# EAGLE board sch_smd_1206_component_only_component_all routed_draft_1 (EAGLE 8.4.1)
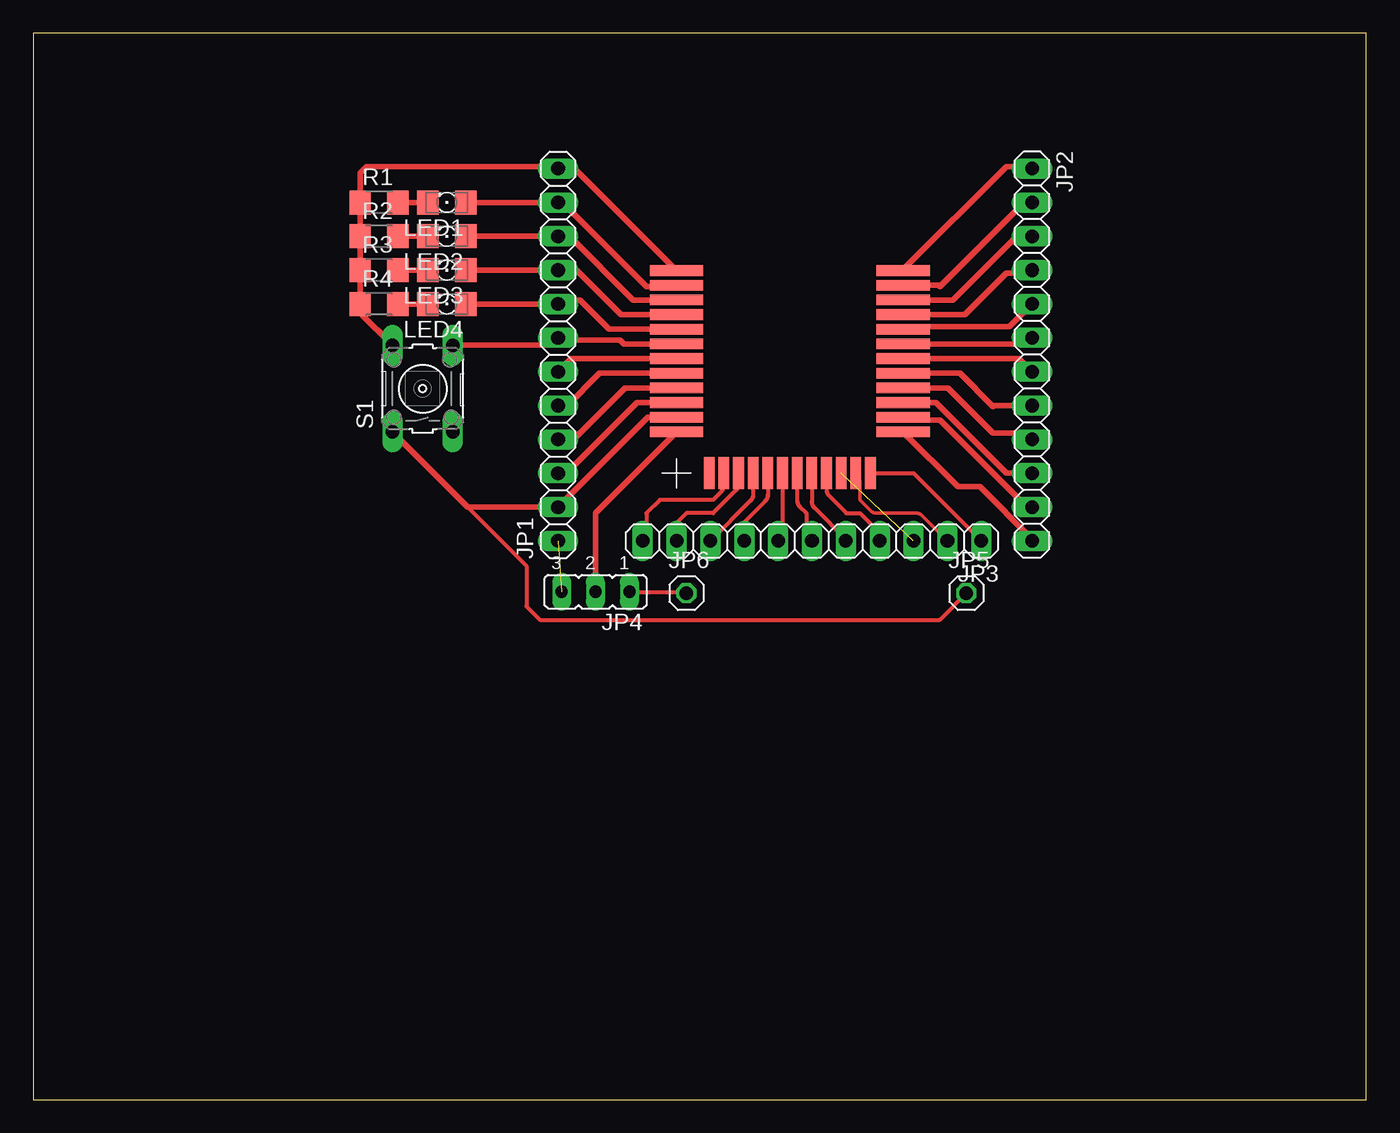
[diagram p0: board, top side]

Size 100 x 80 mm. Coordinates in mm from the lower left corner, seen from the top.
Outline: 0,0 100,0 100,80 0,80 0,0
Copper layers (1*16): Top 0.035mm / dielectric 1.5mm / Bottom 0.035mm
Design rules "default": minimum track width 6mil, minimum drill 0.35mm, track to track 6mil, track to pad 6mil, pad to pad 6mil, via to via 6mil, smd to smd 6mil, copper to edge 40mil, drill to drill 6mil, minimum pad ring 10mil, minimum via ring 8mil, stop-mask expansion 4mil, vias tented up to drill 0mil, thermal gap 10mil

## Footprints (pad centres in the part's own frame; a part is rotated, then mirrored left to right if it is on the bottom)
1X12 = drill 1.016 long: 1 -13.97,0; 2 -11.43,0; 3 -8.89,0; 4 -6.35,0; 5 -3.81,0; 6 -1.27,0; 7 1.27,0; 8 3.81,0; 9 6.35,0; 10 8.89,0; 11 11.43,0; 12 13.97,0
1X11 = drill 1.016 long: 1 -12.7,0; 2 -10.16,0; 3 -7.62,0; 4 -5.08,0; 5 -2.54,0; 6 0,0; 7 2.54,0; 8 5.08,0; 9 7.62,0; 10 10.16,0; 11 12.7,0
JP2 = drill 0.914 long: 1 -2.54,0; 2 0,0; 3 2.54,0
1X01 = drill 1.016 octagon: 1 0,0
LED_1206 = smd 1.6 x 1.803: A -1.422,0; C 1.422,0
R1206 = smd 1.6 x 1.803: 1 -1.422,0; 2 1.422,0
B3F-10XX = drill 1.016 long: 1 -3.251,2.261; 2 3.251,2.261; 3 -3.251,-2.261; 4 3.251,-2.261
SMD_PAD_VERSION = smd 4 x 0.8: P$01 0,15.2; P$02 0,14.1; P$03 0,13; P$04 0,11.9; P$05 0,10.8; P$06 0,9.7; P$07 0,8.6; P$08 0,7.5; P$09 0,6.4; P$10 0,5.3; P$11 0,4.2; P$12 0,3.1; P$25 17,3.1; P$26 17,4.2; P$27 17,5.3; P$28 17,6.4; P$29 17,7.5; P$30 17,8.6; P$31 17,9.7; P$32 17,10.8; P$33 17,11.9; P$34 17,13; P$35 17,14.1; P$36 17,15.2 | smd 0.8 x 2.4: P$13 2.45,0; P$14 3.55,0; P$15 4.65,0; P$16 5.75,0; P$17 6.85,0; P$18 7.95,0; P$19 9.05,0; P$20 10.15,0; P$21 11.25,0; P$22 12.35,0; P$23 13.45,0; P$24 14.55,0

## Placement (x,y rotation side)
JP1  [1X12]  39.37,55.88 90 top
JP2  [1X12]  74.93,55.88 270 top
JP3  [1X11]  58.42,41.91 180 top
JP4  [JP2]  42.18,38.1 180 top
JP5  [1X01]  70,38 0 top
JP6  [1X01]  49,38 0 top
LED1  RED  [LED_1206]  31.02,67.31 180 top
LED2  GREEN  [LED_1206]  31.02,64.77 180 top
LED3  W  [LED_1206]  31.02,62.23 180 top
LED4  Y  [LED_1206]  31.02,59.69 180 top
R1  1000  [R1206]  25.94,67.31 0 top
R2  1k  [R1206]  25.94,64.77 0 top
R3  1k  [R1206]  25.94,62.23 0 top
R4  1k  [R1206]  25.94,59.69 0 top
S1  [B3F-10XX]  29.21,53.34 90 top
U$1  HZX_MODULE  [SMD_PAD_VERSION]  48.26,46.99 0 top

## Library data of the parts
JP1 = pinhead; SPICEPREFIX: X
JP2 JP3 JP5 JP6 = pinhead
JP4 = jumper
LED1-LED4 = eagle-ltspice; SPICEMODEL: NONE; SPICEPREFIX: D; SPICETYPE: diode
R1-R4 = eagle-ltspice; SPICEMODEL: NONE; SPICEPREFIX: R
S1 = switch-omron; MPN: B3F-1000; OC_FARNELL: 176432; OC_NEWARK: 36M3542
U$1 = HZX_MODULE; AUTHOR: Agam

## Nets
N$1: JP4.2 U$1.P$12
N$3: JP1.3 U$1.P$10
N$4: JP1.4 U$1.P$09
N$5: JP1.5 U$1.P$08
N$6: JP1.6 U$1.P$07
N$7: JP1.7 S1.4 U$1.P$06
N$8: JP1.8 LED4.A U$1.P$05
N$9: JP1.9 LED3.A U$1.P$04
N$10: JP1.10 LED2.A U$1.P$03
N$11: JP1.11 LED1.A U$1.P$02
N$12: JP1.1 JP4.3
N$13: JP2.1 U$1.P$36
N$14: JP2.2 U$1.P$35
N$15: JP2.3 U$1.P$34
N$16: JP2.4 U$1.P$33
N$17: JP2.5 U$1.P$32
N$18: JP2.6 U$1.P$31
N$19: JP2.7 U$1.P$30
N$20: JP2.8 U$1.P$29
N$21: JP2.9 U$1.P$28
N$22: JP2.10 U$1.P$27
N$23: JP2.11 U$1.P$26
N$24: JP2.12 U$1.P$25
N$25: JP3.1 U$1.P$24
N$26: JP3.2 U$1.P$23
N$27: JP3.3 U$1.P$22
N$28: JP3.4 U$1.P$21
N$29: JP3.5 U$1.P$20
N$30: JP3.6 U$1.P$19
N$31: JP3.7 U$1.P$18
N$32: JP3.8 U$1.P$17
N$33: JP3.9 U$1.P$16
N$34: JP3.10 U$1.P$15
N$35: JP3.11 U$1.P$14
N$37: JP1.2 JP5.1 S1.1 U$1.P$11
N$38: JP4.1 JP6.1
N$39: LED1.C R1.2
N$40: LED2.C R2.2
N$41: LED3.C R3.2
N$42: LED4.C R4.2
N$44: JP1.12 R1.1 R2.1 R3.1 R4.1 S1.2 U$1.P$01

## Tracks (layer width: path | path; a pad name or v marks a point on that pad's centre or on a via)
N$1
  Top 0.406: U$1.P$12 42.18,44.01 JP4.2
N$3
  Top 0.406: U$1.P$10 45.29,52.29 40,47 JP1.3
N$4
  Top 0.406: U$1.P$09 44.39,53.39 40.53,49.53 JP1.4
N$5
  Top 0.406: U$1.P$08 42.49,54.49 40,52 39.44,52 JP1.5
N$6
  Top 0.406: U$1.P$07 40.35,55.59 JP1.6
N$7
  Top 0.406: U$1.P$06 44.31,56.69 44,57 39.52,57 JP1.7 38.81,56.59 S1.4 32.41,56.59
N$8
  Top 0.406: U$1.P$05 43.21,57.79 41,60 39.68,60 JP1.8 LED4.A
N$9
  Top 0.406: U$1.P$04 44.11,58.89 40.77,62.23 JP1.9 LED3.A
N$10
  Top 0.406: 40,64.77 JP1.10 | 40,64.77 40.23,64.77 45,60 U$1.P$03 | LED2.A 40,64.77
N$11
  Top 0.406: U$1.P$02 48.17,61 46,61 39.69,67.31 JP1.11 LED1.A
N$12  (1 unrouted)
N$13
  Top 0.406: U$1.P$36 65.26,62.26 73,70 74.78,70 JP2.1
N$14
  Top 0.406: U$1.P$35 67.91,61.09 68,61 74,67 74.62,67 JP2.2
N$15
  Top 0.406: U$1.P$34 68.99,59.99 74,65 74.7,65 JP2.3
N$16
  Top 0.406: U$1.P$33 69.89,58.89 73,62 74.7,62 JP2.4
N$17
  Top 0.406: U$1.P$32 65.79,57.79 66,58 73.24,58 JP2.5
N$18
  Top 0.406: U$1.P$31 74.47,56.69 JP2.6
N$19
  Top 0.406: 74.54,55 JP2.7 73.95,55.59 U$1.P$30
N$20
  Top 0.406: U$1.P$29 69.51,54.49 72,52 72.07,52.07 JP2.8
N$21
  Top 0.406: U$1.P$28 68.61,53.39 72,50 74.46,50 JP2.9 75,49.46 75,49
N$22
  Top 0.406: U$1.P$27 67.71,52.29 73.01,46.99 JP2.10
N$23
  Top 0.406: U$1.P$26 65.45,51 68,51 74.55,44.45 JP2.11
N$24
  Top 0.406: U$1.P$25 69.35,46 71,46 74.93,42.07 JP2.12
N$25
  Top 0.305: U$1.P$24 65.98,46.99 arc45 66,47 arc-45 66.05,46.98 JP3.1
N$26
  Top 0.254: U$1.P$23 61.81,46.89 arc-45 62,46.44 62,45 62.81,44.19 arc45 63.26,44 66.23,44 arc-45 66.68,43.81 JP3.2
N$27  (1 unrouted)
N$28
  Top 0.305: U$1.P$21 59.51,45.75 arc45 59.7,45.3 61,44 62,44 63.31,42.69 arc-45 63.5,42.24 JP3.4
N$29
  Top 0.305: U$1.P$20 58.41,44.85 arc45 58.6,44.4 61,42 arc-45 JP3.5
N$30
  Top 0.305: U$1.P$19 57.31,44.95 arc45 57.5,44.5 58,44 58,42.59 arc45 58.19,42.14 JP3.6
N$31
  Top 0.305: U$1.P$18 56.21,42.5 arc-45 56.02,42.05 JP3.7
N$32
  Top 0.305: U$1.P$17 55.11,45.37 arc-45 54.92,44.92 53,43 53,42.51 arc45 53.19,42.06 JP3.8
N$33
  Top 0.305: U$1.P$16 54.01,45.38 arc-45 53.82,44.93 JP3.9
N$34
  Top 0.305: U$1.P$15 52.91,46.17 arc-45 52.72,45.72 51,44 49,44 48,43 48,42.43 arc45 48.19,41.98 JP3.10
N$35
  Top 0.305: U$1.P$14 51.81,46.07 arc-45 51.62,45.62 51,45 47,45 46,44 46,42.45 arc-45 45.81,42 JP3.11
N$37
  Top 0.305: 32.59,44.45 37,40.04 37,37 38,36 68,36 JP5.1
  Top 0.406: U$1.P$11 46.11,51.19 JP1.2 32.59,44.45 S1.1
N$38
  Top 0.305: JP4.1 48.9,38.1 JP6.1
N$39
  Top 0.406: R1.2 LED1.C
N$40
  Top 0.406: R2.2 LED2.C
N$41
  Top 0.406: R3.2 LED3.C
N$42
  Top 0.406: R4.2 LED4.C
N$44
  Top 0.406: U$1.P$01 40.6,69.85 JP1.12 39.22,70 25,70 24.52,69.52 R1.1 R2.1 R3.1 R4.1 24.52,59.02 S1.2